# Altium PCB PCB1.PcbDoc
Units mm, origin at the board's own origin, x right, y up, seen from the top; angles counter-clockwise.
Board outline 100 x 100 mm, 4 copper layers (Top Layer 1, Top Layer, Bottom Layer, Bottom Layer 1), stack 1.564 mm thick; 51 components, 49 nets, 288 pads, 24 vias.
Unrouted connection lines stored in the file: 152.
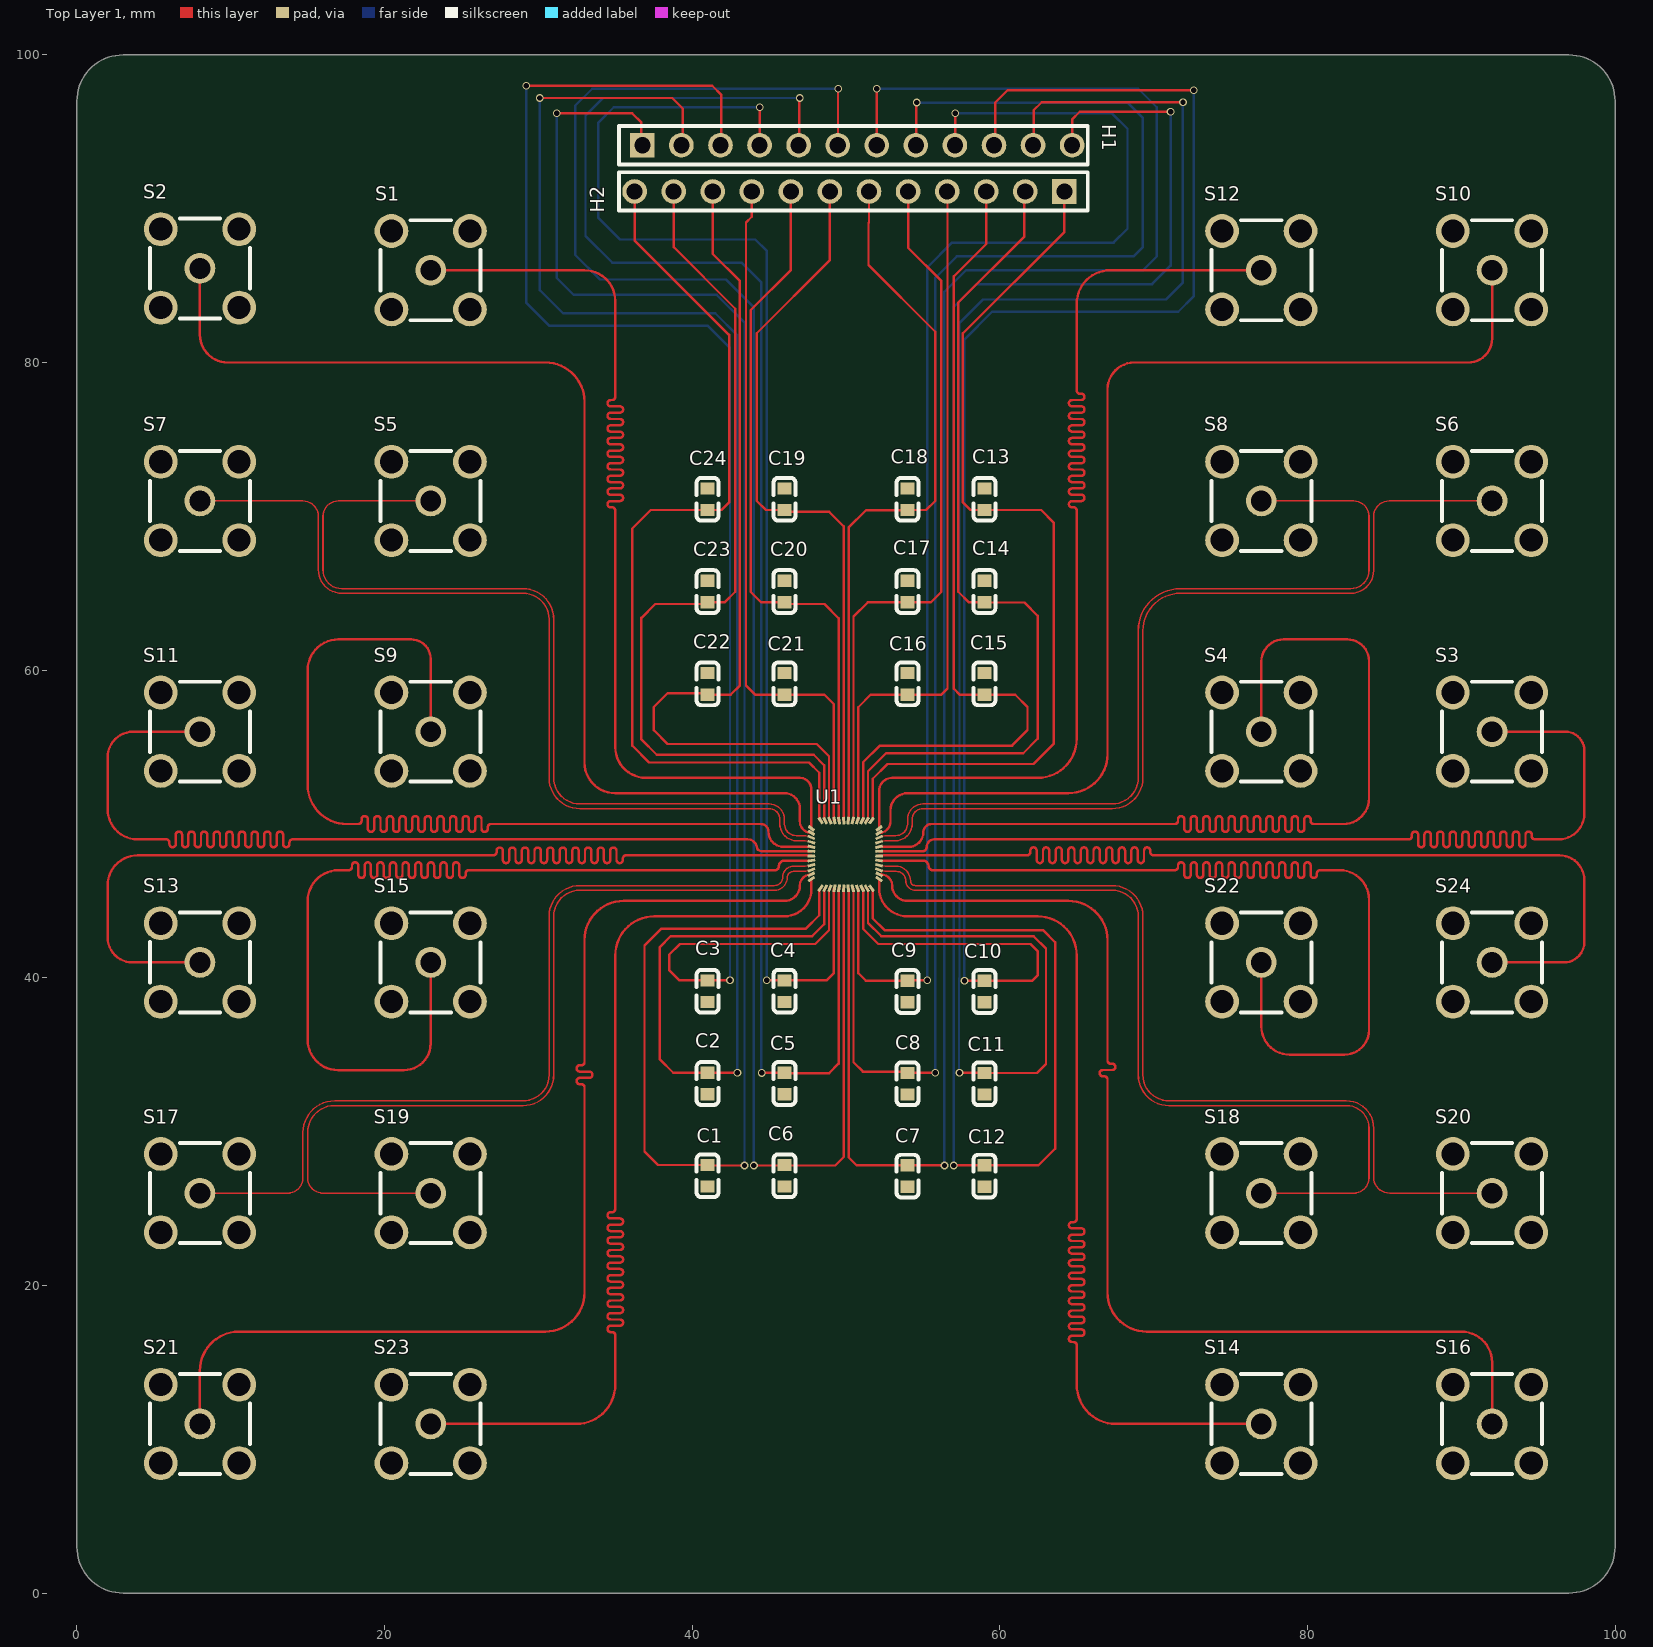
[diagram p0: Top Layer 1 view]
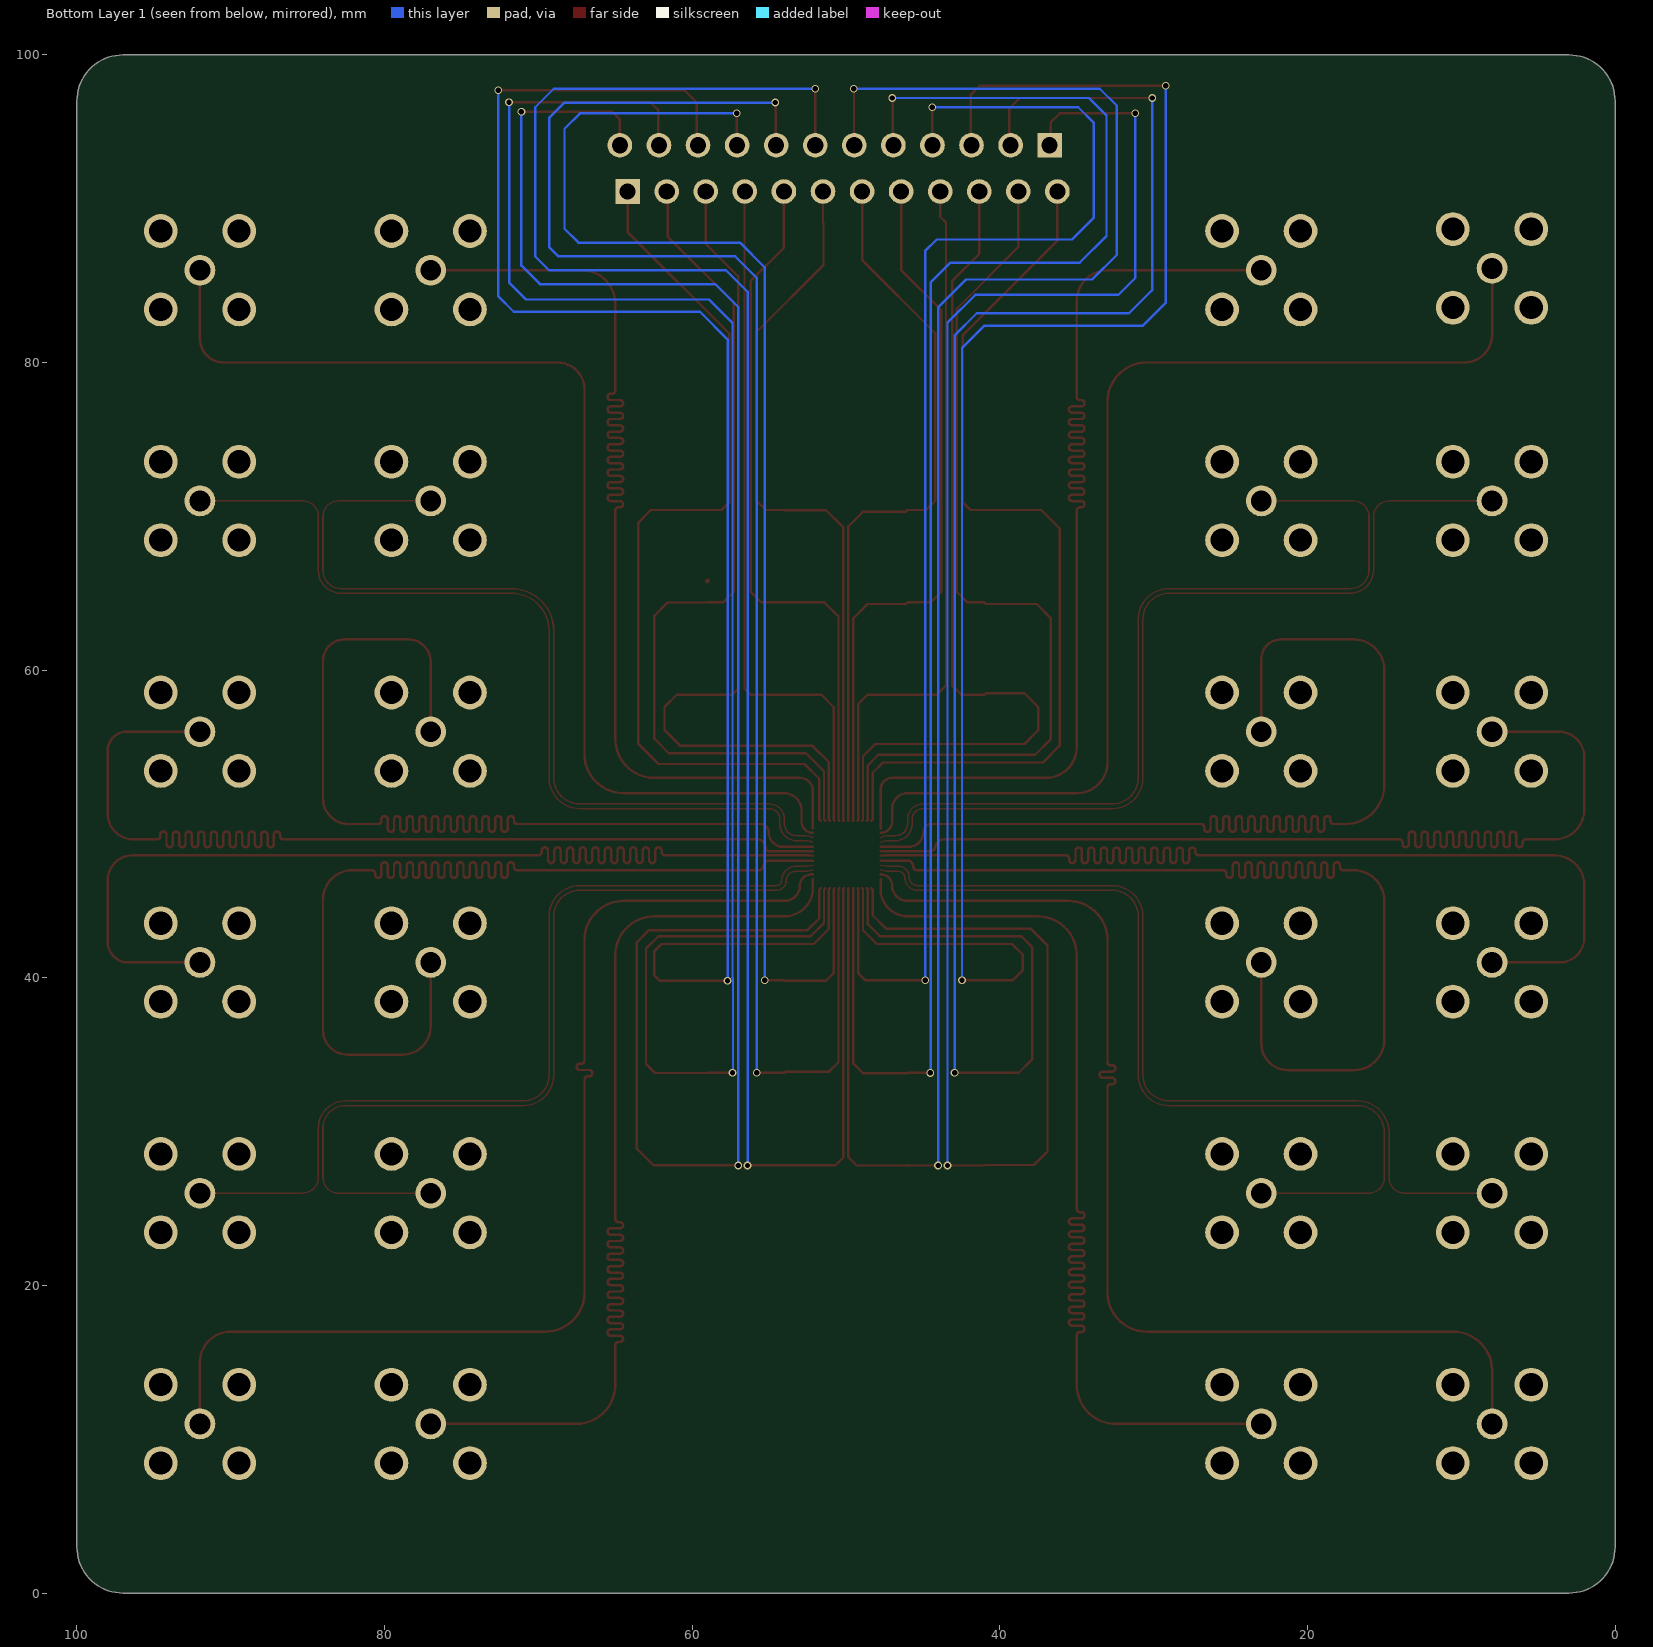
[diagram p1: Bottom Layer 1 view, seen from below]
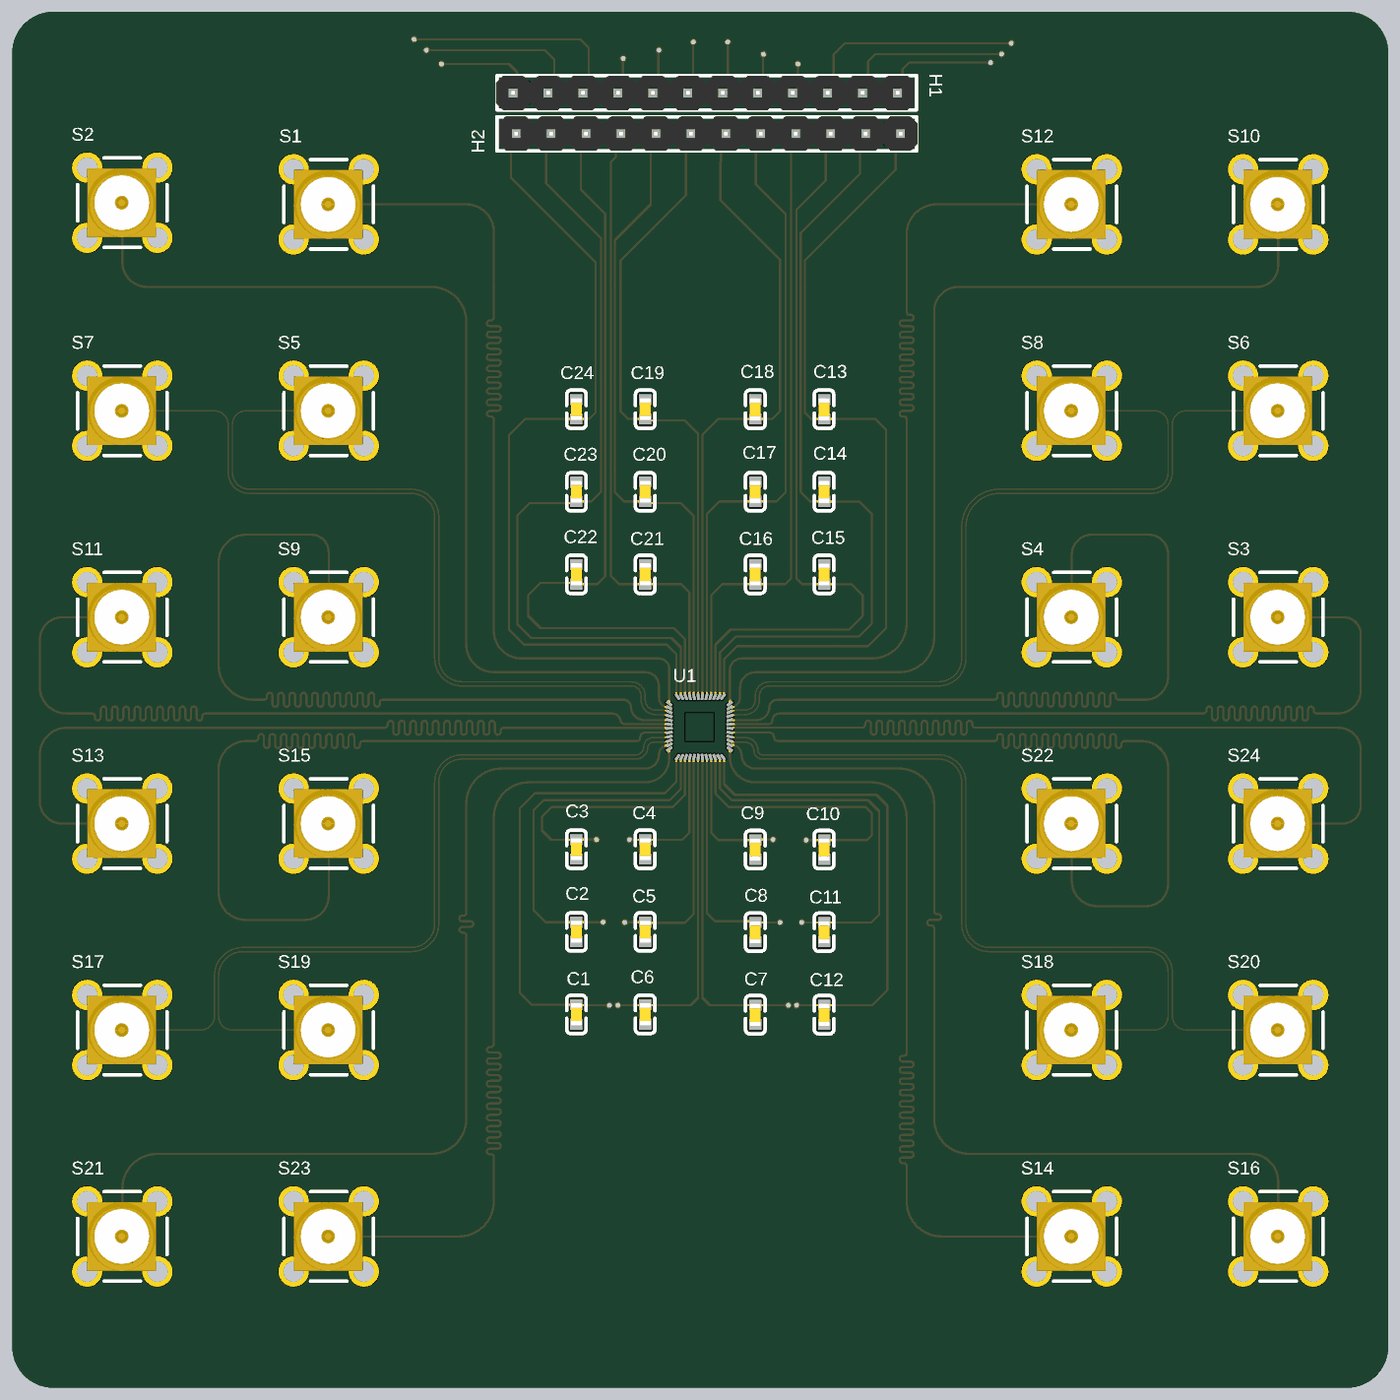
[diagram p2: 3D render of the assembled board from above, using the file's embedded part models]

## Layer stack, top to bottom
Top Solder: solder mask 0.0102, Solder Resist, Dk 3.5
Top Layer 1: signal copper 0.035
Dielectric 2: prepreg 0.0994, PP-006, Dk 4.1
Top Layer: signal copper 0.0152
Dielectric 1: dielectric 1.265, FR-4, Dk 4.8
Bottom Layer: signal copper 0.0152
Dielectric 3: prepreg 0.0994, PP-006, Dk 4.1
Bottom Layer 1: signal copper 0.035
Bottom Solder: solder mask 0.0102, Solder Resist, Dk 3.5

## Board outline
0,3 0,97 cw(c3,97) 3,100 97,100 cw(c97,97) 100,97 100,3 cw(c97,3) 97,0 3,0 cw(c3,3)

## Design rules (kind name [scope] priority, off if disabled: settings)
Clearance [All] p1: gap=0.025 ignorepadtopadclearanceinfootprint=FALSE
DiffPairsRouting [All] p1: maxlimit=0.254 minlimit=0.203 mostfreqgap=0.203 toplayer_minwidth=0.001 toplayer_maxwidth=0.124 toplayer_prefwidth=0.124 midlayer1_minwidth=0.001 midlayer1_maxwidth=0.124 midlayer1_prefwidth=0.124 midlayer2_minwidth=0.001 midlayer2_maxwidth=0.124 midlayer2_prefwidth=0.124 bottomlayer_minwidth=0.001 bottomlayer_maxwidth=0.124 bottomlayer_prefwidth=0.124 maxuncoupledlength=12.7
PlaneConnect [All] p1: planeconnectstyle=Direct reliefexpansion=0.508 reliefentries=4 reliefconductorwidth=0.254 reliefairgap=0.254
PolygonConnect [All] p1: connectstyle=Direct reliefconductorwidth=0.254 reliefentries=4 polygonreliefangle="90 Angle" airgapwidth=0.254
RoutingVias [All] p1: holewidth=0.711 width=1.27 viastyle="Through Hole" minholewidth=0.05 minwidth=0.1 maxholewidth=3 maxwidth=5
SolderMaskExpansion [All] p1: expansion=0.102 istentingtop=FALSE
SupplyNets "Schematic Supply Nets" [InNet('GND')] p1: voltage=0.000
Width [InNet('GND')] p1: maxlimit=0.3 minlimit=0.3 preferedwidth=0.3
28 further rules are at their usual default settings.

## Classes and differential pairs
differential pair RF21: +RF21_P -RF21_N
differential pair RF15: +RF15_P -RF15_N
differential pair RF9: +RF9_P -RF9_N
differential pair RF3: +RF3_P -RF3_N

## Components (designator, comment, footprint, x,y, rotation, side; value= is the part's Value field where it differs from the comment)
C1 "C0603" C0603 41,27.121 r270 top
C2 "C0603" C0603 41,33.121 r270 top
C3 "C0603" C0603 41,39.121 r270 top
C4 "C0603" C0603 46,39.121 r270 top
C5 "C0603" C0603 46,33.121 r270 top
C6 "C0603" C0603 46,27.121 r270 top
C7 "C0603" C0603 54,27.121 r90 top
C8 "C0603" C0603 54,33.121 r90 top
C9 "C0603" C0603 54,39.121 r90 top
C10 "C0603" C0603 59,39.121 r90 top
C11 "C0603" C0603 59,33.121 r90 top
C12 "C0603" C0603 59,27.121 r90 top
C13 "C0603" C0603 59,71.121 r90 top
C14 "C0603" C0603 59,65.121 r90 top
C15 "C0603" C0603 59,59.121 r90 top
C16 "C0603" C0603 54,59.121 r90 top
C17 "C0603" C0603 54,65.121 r90 top
C18 "C0603" C0603 54,71.121 r90 top
C19 "C0603" C0603 46,71.101 r270 top
C20 "C0603" C0603 46,65.101 r270 top
C21 "C0603" C0603 46,59.101 r270 top
C22 "C0603" C0603 41,59.101 r270 top
C23 "C0603" C0603 41,65.101 r270 top
C24 "C0603" C0603 41,71.101 r270 top
H1 "20P" 20P 50.857,94.121 r0 top
H2 "20P" 20P 50.099,91.121 r180 top
S1 "BWSMA" BWSMA 23,86 r0 top
S2 "BWSMA" BWSMA 8,86.121 r0 top
S3 "BWSMA" BWSMA 92,56 r0 top
S4 "BWSMA" BWSMA 77,56 r0 top
S5 "BWSMA" BWSMA 23,71 r0 top
S6 "BWSMA" BWSMA 92,71 r0 top
S7 "BWSMA" BWSMA 8,71 r0 top
S8 "BWSMA" BWSMA 77,71 r0 top
S9 "BWSMA" BWSMA 23,56 r0 top
S10 "BWSMA" BWSMA 92,86 r0 top
S11 "BWSMA" BWSMA 8,56 r0 top
S12 "BWSMA" BWSMA 77,86 r0 top
S13 "BWSMA" BWSMA 8,41 r0 top
S14 "BWSMA" BWSMA 77,11 r0 top
S15 "BWSMA" BWSMA 23,41 r0 top
S16 "BWSMA" BWSMA 92,11 r0 top
S17 "BWSMA" BWSMA 8,26 r0 top
S18 "BWSMA" BWSMA 77,26 r0 top
S19 "BWSMA" BWSMA 23,26 r0 top
S20 "BWSMA" BWSMA 92,26 r0 top
S21 "BWSMA" BWSMA 8,11 r0 top
S22 "BWSMA" BWSMA 77,41 r0 top
S23 "BWSMA" BWSMA 23,11 r0 top
S24 "BWSMA" BWSMA 92,41 r0 top
U1 "2mm" 2mm 49.05,48.721 r0 top

## Footprints (in the part's own frame and the unit in brackets; to place one, negate y for a bottom-side part, rotate by r counter-clockwise, add the part's x,y. Pads: shape width x height; smd on the part's side, far side on the other; paste and mask are expansions set on the pad)
2mm [mm]
  rrect50% 0.5x0.2 smd rot 142.43: 1(-1.3,1)
  rect 0.1x0.05 on Mech16 mask+0.102: 1(0,0) 2(0,-0.1) 3(0,-0.2) 4(0,-0.3) 5(0,-0.55) 6(0,-0.65) 7(0,-0.75) 8(0,-0.85) 9(0,-1.1) 10(0,-1.2) 11(0,-1.3) 12(0,-1.4) 25(1.8,-1.4) 26(1.8,-1.3) 27(1.8,-1.2) 28(1.8,-1.1) 29(1.8,-0.85) 30(1.8,-0.75) 31(1.8,-0.65) 32(1.8,-0.55) 33(1.8,-0.3) 34(1.8,-0.2) 35(1.8,-0.1) 36(1.8,0)
  rrect50% 0.5x0.2 smd rot 148.27: 2(-1.3,0.7)
  rrect50% 0.5x0.2 smd rot 155.09: 3(-1.3,0.4)
  rrect50% 0.5x0.2 smd rot 162.81: 4(-1.3,0.1)
  rrect50% 0.5x0.2 smd rot 164.93: 5(-1.3,-0.2)
  rrect50% 0.5x0.2 smd rot 173.42: 6(-1.3,-0.5)
  rrect50% 0.5x0.2 smd rot 2.12: 7(-1.3,-0.8)
  rrect50% 0.5x0.2 smd rot 10.71: 8(-1.3,-1.1)
  rrect50% 0.5x0.2 smd rot 12.99: 9(-1.3,-1.4)
  rrect50% 0.5x0.2 smd rot 21.02: 10(-1.3,-1.7)
  rrect50% 0.5x0.2 smd rot 28.16: 11(-1.3,-2)
  rrect50% 0.5x0.2 smd rot 34.76: 12(-1.3,-2.3)
  rrect50% 0.5x0.2 smd rot 55.3: 13(-0.7,-2.9)
  rect 0.05x0.1 on Mech16 mask+0.102: 13(0.2,-1.6) 14(0.3,-1.6) 15(0.4,-1.6) 16(0.5,-1.6) 17(0.75,-1.6) 18(0.85,-1.6) 19(0.95,-1.6) 20(1.05,-1.6) 21(1.3,-1.6) 22(1.4,-1.6) 23(1.5,-1.6) 24(1.6,-1.6) 37(1.6,0.2) 38(1.5,0.2) 39(1.4,0.2) 40(1.3,0.2) 41(1.05,0.2) 42(0.95,0.2) 43(0.85,0.2) 44(0.75,0.2) 45(0.5,0.2) 46(0.4,0.2) 47(0.3,0.2) 48(0.2,0.2)
  rrect50% 0.5x0.2 smd rot 61.8: 14(-0.4,-2.9)
  rrect50% 0.5x0.2 smd rot 68.98: 15(-0.1,-2.9)
  rrect50% 0.5x0.2 smd rot 76.84: 16(0.2,-2.9)
  rrect50% 0.5x0.2 smd rot 79.11: 17(0.5,-2.9)
  rrect50% 0.5x0.2 smd rot 87.95: 18(0.8,-2.9)
  rrect50% 0.5x0.2 smd rot 96.78: 19(1.1,-2.9)
  rrect50% 0.5x0.2 smd rot 105.2: 20(1.4,-2.9)
  rrect50% 0.5x0.2 smd rot 107.1: 21(1.7,-2.9)
  rrect50% 0.5x0.2 smd rot 115.07: 22(2,-2.9)
  rrect50% 0.5x0.2 smd rot 121.65: 23(2.3,-2.9)
  rrect50% 0.5x0.2 smd rot 127.62: 24(2.6,-2.9)
  rrect50% 0.5x0.2 smd rot 145.3: 25(3.1,-2.3)
  rrect50% 0.5x0.2 smd rot 151.55: 26(3.1,-2)
  rrect50% 0.5x0.2 smd rot 159.02: 27(3.1,-1.7)
  rrect50% 0.5x0.2 smd rot 167.01: 28(3.1,-1.4)
  rrect50% 0.5x0.2 smd rot 169.38: 29(3.1,-1.1)
  rrect50% 0.5x0.2 smd rot 177.71: 30(3.1,-0.8)
  rrect50% 0.5x0.2 smd rot 6.73: 31(3.1,-0.5)
  rrect50% 0.5x0.2 smd rot 15.15: 32(3.1,-0.2)
  rrect50% 0.5x0.2 smd rot 17.38: 33(3.1,0.1)
  rrect50% 0.5x0.2 smd rot 24.72: 34(3.1,0.4)
  rrect50% 0.5x0.2 smd rot 31.7: 35(3.1,0.7)
  rrect50% 0.5x0.2 smd rot 37.79: 36(3.1,1)
  rrect50% 0.5x0.2 smd rot 52.43: 37(2.6,1.5)
  rrect50% 0.5x0.2 smd rot 58.24: 38(2.3,1.5)
  rrect50% 0.5x0.2 smd rot 65.21: 39(2,1.5)
  rrect50% 0.5x0.2 smd rot 72.94: 40(1.7,1.5)
  rrect50% 0.5x0.2 smd rot 74.99: 41(1.4,1.5)
  rrect50% 0.5x0.2 smd rot 83.25: 42(1.1,1.5)
  rrect50% 0.5x0.2 smd rot 92.15: 43(0.8,1.5)
  rrect50% 0.5x0.2 smd rot 100.84: 44(0.5,1.5)
  rrect50% 0.5x0.2 smd rot 102.99: 45(0.2,1.5)
  rrect50% 0.5x0.2 smd rot 111.03: 46(-0.1,1.5)
  rrect50% 0.5x0.2 smd rot 118.1: 47(-0.4,1.5)
  rrect50% 0.5x0.2 smd rot 124.48: 48(-0.7,1.5)
  body extent -0.1,-1.7 1.9,0.3, height 0.2
20P [mm]
  rect 1.6x1.6 hole 1.05: 1(-14.097,0)
  round 1.6 hole 1.05: 2(-11.557,0) 3(-9.017,0) 4(-6.477,0) 5(-3.937,0) 6(-1.397,0) 7(1.143,0) 8(3.683,0) 9(6.223,0) 10(8.763,0) 11(11.303,0) 12(13.843,0)
  silkscreen extent -15.62,-1.25 14.86,1.25, body extent -15.71,-1.27 14.73,1.23, height 8.61
BWSMA [mm]
  round 2.2 hole 1.5 paste-2539.97 mask+0.051: 1(-2.55,-2.55) 2(-2.55,2.55) 3(2.55,2.55)
  round 2.2 hole 1.5 copper offset 0,0 paste-2539.97 mask+0.051: 4(2.55,-2.55)
  round 2 hole 1.35 paste-2539.97 mask+0.051: 5(0,0)
  silkscreen extent -3.25,-3.25 3.25,3.25, body extent -2.54,-2.5 2.46,2.5, height 8
C0603 [mm]
  rect 0.8x0.9 smd: 1(-0.71,0) 2(0.69,0)
  silkscreen extent -1.4,-0.71 1.38,0.71, body extent -0.82,-0.4 0.78,0.4, height 0.5

## Via types
v1: diameter 0.5, hole 0.35, Top Layer 1 to Bottom Layer 1, tented both sides, 24 vias

## Nets (pads, with @x,y where several pads share a name; then routed paths per layer and width w, separated by ;. In a path a pad name is that pad's centre, name@x,y a point inside that pad or via, vN(x,y) a via of type N, cw(c..) or ccw(c..) an arc to the next point about the centre after c; other vN are vias at no path point)
GND: C1.2 C2.2 C3.2 C4.2 C5.2 C6.2 C7.1 C8.1 C9.1 C10.1 C11.1 C12.1 C13.2 C14.2 C15.2 C16.2 C17.2 C18.2 C19.1 C20.1 C21.1 C22.1 C23.1 C24.1 S1.1 S1.2 S1.3 S1.4 S2.1 S2.2 S2.3 S2.4 S3.1 S3.2 S3.3 S3.4 S4.1 S4.2 S4.3 S4.4 S5.1 S5.2 S5.3 S5.4 S6.1 S6.2 S6.3 S6.4 S7.1 S7.2 S7.3 S7.4 S8.1 S8.2 S8.3 S8.4 S9.1 S9.2 S9.3 S9.4 S10.1 S10.2 S10.3 S10.4 S11.1 S11.2 S11.3 S11.4 S12.1 S12.2 S12.3 S12.4 S13.1 S13.2 S13.3 S13.4 S14.1 S14.2 S14.3 S14.4 S15.1 S15.2 S15.3 S15.4 S16.1 S16.2 S16.3 S16.4 S17.1 S17.2 S17.3 S17.4 S18.1 S18.2 S18.3 S18.4 S19.1 S19.2 S19.3 S19.4 S20.1 S20.2 S20.3 S20.4 S21.1 S21.2 S21.3 S21.4 S22.1 S22.2 S22.3 S22.4 S23.1 S23.2 S23.3 S23.4 S24.1 S24.2 S24.3 S24.4 | length 0
  Top Layer 1 w0.3: C14.2 C14.2@59.011,65.8
NetC1_1: C1.1 H1.1 U1.13@48.35,45.821 | length 120.4
  Top Layer 1 w0.156: v1(31.2,96.2) 36.1,96.2 36.7,95.6 36.7,94.181 H1.1 ; v1(43.4,27.8) 41.031,27.8 C1.1 37.769,27.831 36.9,28.7 36.9,42.1 38,43.2 47.4,43.2 48.265,44.065 48.265,45.736 U1.13@48.35,45.821
  Bottom Layer 1 w0.156: v1(31.2,96.2) 31.2,85.5 32.3,84.4 41.6,84.4 43.4,82.6 v1(43.4,27.8)
NetC2_1: C2.1 H1.2 U1.14@48.65,45.821 | length 112.9
  Top Layer 1 w0.156: v1(30.1,97.2) 38.7,97.2 39.4,96.5 39.4,94.221 H1.2 ; v1(42.942,33.836) 42.937,33.831 C2.1 38.769,33.831 37.9,34.7 37.9,42 38.6,42.7 47.8,42.7 48.579,43.479 48.579,45.75 U1.14@48.65,45.821
  Bottom Layer 1 w0.156: v1(30.1,97.2) 30.1,84.7 31.6,83.2 41.5,83.2 42.942,81.758 v1(42.942,33.836)
NetC3_1: C3.1 H1.3 U1.15@48.95,45.821 | length 105
  Top Layer 1 w0.156: v1(29.208,97.998) 41.302,97.998 41.9,97.4 41.9,94.181 H1.3 ; C3.1 39.169,39.831 38.5,40.5 38.5,41.5 39.2,42.2 48,42.2 48.896,43.096 48.896,45.767 U1.15@48.95,45.821 ; C3.1@41.01,39.841 v1(42.456,39.841)
  Bottom Layer 1 w0.156: v1(29.208,97.998) 29.2,97.99 29.2,83.9 30.7,82.4 41,82.4 42.456,80.944 v1(42.456,39.841)
NetC4_1: C4.1 H1.4 U1.16@49.25,45.821 | length 88.9
  Top Layer 1 w0.156: H1.4 44.39,94.131 44.39,96.59 v1(44.4,96.6) ; v1(44.854,39.832) 44.855,39.831 C4.1 48.731,39.831 49.216,40.316 49.216,45.787 U1.16@49.25,45.821
  Bottom Layer 1 w0.156: v1(44.4,96.6) 34.9,96.6 33.9,95.6 33.9,89.4 35.3,88 44.1,88 44.854,87.246 v1(44.854,39.832)
NetC5_1: C5.1 H1.5 U1.17@49.55,45.821 | length 106.1
  Top Layer 1 w0.156: v1(44.514,33.818) 44.527,33.831 C5.1 46.031,33.8 48.9,33.8 49.522,34.422 49.522,45.793 U1.17@49.55,45.821 ; H1.5 46.96,94.161 46.96,97.16 v1(47,97.2)
  Bottom Layer 1 w0.156: v1(44.514,33.818) 44.5,33.832 44.5,85.2 43.2,86.5 34.8,86.5 33.065,88.235 33.065,96.065 34.2,97.2 v1(47,97.2)
NetC6_1: C6.1 H1.6 U1.18@49.85,45.821 | length 123.3
  Top Layer 1 w0.156: v1(44.015,27.8) 45.969,27.8 C6.1 46.031,27.8 49.3,27.8 49.85,28.35 U1.18@49.85,45.821 ; H1.6 49.48,94.141 49.48,97.78 v1(49.5,97.8)
  Bottom Layer 1 w0.156: v1(44.015,27.8) 44.015,83.585 42.2,85.4 34,85.4 32.4,87 32.4,96.7 33.5,97.8 v1(49.5,97.8)
NetC7_2: C7.2 H1.7 U1.19@50.15,45.821 | length 127.6
  Top Layer 1 w0.156: U1.19@50.15,45.821 50.168,45.803 50.168,28.332 50.689,27.811 C7.2 56.389,27.811 v1(56.4,27.8) ; H1.7 v1(52,97.8)
  Bottom Layer 1 w0.156: v1(52,97.8) 69,97.8 70.2,96.6 70.2,86.9 69.3,86 57.8,86 56.4,84.6 v1(56.4,27.8)
NetC8_2: C8.2 H1.8 U1.20@50.45,45.821 | length 109.4
  Top Layer 1 w0.156: U1.20@50.45,45.821 50.489,45.782 50.489,34.511 51.1,33.9 53.911,33.9 C8.2 54.011,33.822 v1(55.809,33.822) ; H1.8 54.566,94.147 54.566,96.88 v1(54.593,96.906)
  Bottom Layer 1 w0.156: v1@54.492,96.906 v1(54.593,96.906) 54.694,96.906 54.7,96.9 68.3,96.9 69.3,95.9 69.3,87.5 68.7,86.9 57.2,86.9 55.809,85.509 v1(55.809,33.822)
NetC9_2: C9.2 H1.9 U1.21@50.75,45.821 | length 90.8
  Top Layer 1 w0.156: U1.21@50.75,45.821 50.794,45.777 50.794,40.306 51.289,39.811 C9.2 54.029,39.839 v1(55.291,39.839) ; H1.9 57.09,94.131 57.09,96.19 v1(57.1,96.2)
  Bottom Layer 1 w0.156: v1(55.291,39.839) 55.291,86.191 56.9,87.8 67.4,87.8 68.3,88.7 68.3,95.2 67.3,96.2 v1(57.1,96.2)
NetC10_2: C10.2 H1.10 U1.22@51.05,45.821 | length 108.3
  Top Layer 1 w0.156: U1.22@51.05,45.821 51.114,45.757 51.114,43.186 52.1,42.2 62,42.2 62.46,41.74 62.46,40.16 62.1,39.8 59.011,39.8 C10.2 58.989,39.8 v1(57.7,39.8) ; H1.10 59.7,94.201 59.7,96.9 60.5,97.7 v1(72.6,97.7)
  Bottom Layer 1 w0.156: v1(57.7,39.8) 57.7,81.5 59.5,83.3 71.6,83.3 72.6,84.3 v1(72.6,97.7)
NetC11_2: C11.2 H1.11 U1.23@51.35,45.821 | length 116.3
  Top Layer 1 w0.156: U1.23@51.35,45.821 51.429,45.742 51.429,43.571 52.3,42.7 62.2,42.7 63,41.9 63,34.4 62.411,33.811 C11.2 58.989,33.822 v1(57.376,33.822) ; H1.11 62.2,94.161 62.2,96.4 62.726,96.926 v1(71.905,96.926)
  Bottom Layer 1 w0.156: v1(57.376,33.822) 57.346,33.851 57.346,39.946 57.376,39.976 57.376,82.576 58.9,84.1 70.8,84.1 71.905,85.205 v1(71.905,96.926)
NetC12_2: C12.2 H1.12 U1.24@51.65,45.821 | length 124.3
  Top Layer 1 w0.156: U1.24@51.65,45.821 51.742,45.729 51.742,43.858 52.5,43.1 62.8,43.1 63.6,42.3 63.6,28.9 62.511,27.811 C12.2 57.011,27.811 v1(57,27.8) ; H1.12 64.7,95.8 65.2,96.3 v1(71.1,96.3)
  Bottom Layer 1 w0.156: v1(57,27.8) 57,83.6 58.5,85.1 69.9,85.1 71.1,86.3 v1(71.1,96.3)
NetC13_1: C13.1 H2.1 U1.37@51.65,50.221 | length 59.2
  Top Layer 1 w0.156: U1.37@51.65,50.221 51.741,50.312 51.741,52.941 52.7,53.9 62.2,53.9 63.5,55.2 63.5,69.6 62.689,70.411 C13.1 58.089,70.411 57.6,70.9 57.6,81.9 64.196,88.496 H2.1
NetC14_1: C14.1 H2.2 U1.38@51.35,50.221 | length 56.8
  Top Layer 1 w0.156: U1.38@51.35,50.221 51.429,50.3 51.429,53.429 52.6,54.6 61.52,54.6 62.46,55.54 62.46,63.54 61.6,64.4 59.011,64.4 C14.1 57.989,64.411 57.3,65.1 57.3,83.9 61.6,88.2 61.6,91.065 H2.2
NetC15_1: C15.1 H2.3 U1.39@51.05,50.221 | length 55.4
  Top Layer 1 w0.156: U1.39@51.05,50.221 51.113,50.284 51.113,54.013 52.2,55.1 60.8,55.1 61.8,56.1 61.8,57.6 61,58.4 59.011,58.4 C15.1 57.389,58.411 57,58.8 57,85.6 59.116,87.716 H2.3
NetC16_1: C16.1 H2.4 U1.40@50.75,50.221 | length 46
  Top Layer 1 w0.156: U1.40@50.75,50.221 50.794,50.265 50.794,57.594 51.611,58.411 C16.1 56.211,58.411 56.6,58.8 56.6,91.097 H2.4
NetC17_1: C17.1 H2.5 U1.41@50.45,50.221 | length 46.6
  Top Layer 1 w0.156: U1.41@50.45,50.221 50.489,50.26 50.489,63.489 51.411,64.411 C17.1 55.511,64.411 56.2,65.1 56.2,85.3 54.036,87.464 H2.5
NetC18_1: C18.1 H2.6 U1.42@50.15,50.221 | length 47.3
  Top Layer 1 w0.156: U1.42@50.15,50.221 50.168,50.239 50.168,69.268 51.3,70.4 53.989,70.4 C18.1 55.211,70.411 55.8,71 55.8,82 51.465,86.335 51.465,89.079 51.496,89.11 H2.6
NetC19_2: C19.2 H2.7 U1.43@49.85,50.221 | length 47.6
  Top Layer 1 w0.156: H2.7 48.956,86.656 44.2,81.9 44.2,71 44.789,70.411 C19.2 46.111,70.3 48.9,70.3 49.85,69.35 U1.43@49.85,50.221
NetC20_2: C20.2 H2.8 U1.44@49.55,50.221 | length 46.7
  Top Layer 1 w0.156: H2.8 46.416,86.016 43.8,83.4 43.8,65.1 44.489,64.411 C20.2 46.111,64.3 48.6,64.3 49.522,63.378 49.522,50.249 U1.44@49.55,50.221
NetC21_2: C21.2 H2.9 U1.45@49.25,50.221 | length 46.1
  Top Layer 1 w0.156: H2.9 43.876,89.476 43.5,89.1 43.5,59 44.089,58.411 C21.2 48.589,58.411 49.216,57.784 49.216,50.255 U1.45@49.25,50.221
NetC22_2: C22.2 H2.10 U1.46@48.95,50.221 | length 56.9
  Top Layer 1 w0.156: H2.10 41.336,87.064 43.1,85.3 43.1,59 42.511,58.411 C22.2 40.911,58.5 38.4,58.5 37.5,57.6 37.5,56.1 38.4,55.2 48.1,55.2 48.896,54.404 48.896,50.275 U1.46@48.95,50.221
NetC23_2: C23.2 H2.11 U1.47@48.65,50.221 | length 58.6
  Top Layer 1 w0.156: H2.11 38.8,91.117 38.8,87.5 42.8,83.5 42.8,65.1 42.111,64.411 C23.2 40.889,64.3 37.6,64.3 36.7,63.4 36.7,55.5 37.7,54.5 47.9,54.5 48.579,53.821 48.579,50.292 U1.47@48.65,50.221
NetC24_2: C24.2 H2.12 U1.48@48.35,50.221 | length 59.9
  Top Layer 1 w0.156: H2.12 36.256,87.944 42.4,81.8 42.4,70.9 41.911,70.411 C24.2 37.311,70.411 36.1,69.2 36.1,55.1 37.2,54 47.6,54 48.265,53.335 48.265,50.306 U1.48@48.35,50.221
RF1: S1.5 U1.1@47.75,49.721 | length 73.1
  Top Layer 1 w0.156: S1.5 33,86 cw(c33,84) 35,84 35,80.1 35,78.2 35,77.767 cw(c34.795,77.767) 34.795,77.562 34.697,77.562 ccw(c34.697,77.357) 34.697,77.152 35.303,77.152 cw(c35.303,76.946) 35.303,76.741 34.697,76.741 ccw(c34.697,76.536) 34.697,76.331 35.303,76.331 cw(c35.303,76.125) 35.303,75.92 34.697,75.92 ccw(c34.697,75.715) 34.697,75.51 35.303,75.51 cw(c35.303,75.304) 35.303,75.099 34.697,75.099 ccw(c34.697,74.894) 34.697,74.689 35.303,74.689 cw(c35.303,74.483) 35.303,74.278 34.697,74.278 ccw(c34.697,74.073) 34.697,73.868 35.303,73.868 cw(c35.303,73.662) 35.303,73.457 34.697,73.457 ccw(c34.697,73.252) 34.697,73.047 35.303,73.047 cw(c35.303,72.841) 35.303,72.636 34.697,72.636 ccw(c34.697,72.431) 34.697,72.226 35.303,72.226 cw(c35.303,72.02) 35.303,71.815 34.697,71.815 ccw(c34.697,71.61) 34.697,71.405 35.303,71.405 cw(c35.303,71.199) 35.303,70.994 34.697,70.994 ccw(c34.697,70.789) 34.697,70.584 34.795,70.584 cw(c34.795,70.378) 35,70.378 35,70.3 35,55 ccw(c37,55) 37,53 47,53 cw(c47,52.25) 47.75,52.25 U1.1@47.75,49.721
RF2: S2.5 U1.2@47.75,49.421 | length 73
  Top Layer 1 w0.156: S2.5 8,81.809 ccw(c9.809,81.809) 9.809,80 30.46,80 cw(c30.46,77.46) 33,77.46 33,54 ccw(c35,54) 35,52 46,52 cw(c46,51) 47,51 47,50.171 ccw(c47.75,50.171) U1.2@47.75,49.421
RF3_N: S7.5 U1.4@47.75,48.821 | length 58.4
  Top Layer 1 w0.1: S7.5 14.697,71 cw(c14.697,70) 15.697,70 15.697,66.52 ccw(c17.216,66.52) 17.216,65 29,65 cw(c29,63.303) 30.697,63.303 30.697,53 ccw(c32.697,53) 32.697,51 45,51 cw(c45,50.303) 45.697,50.303 45.697,50 ccw(c46.787,50) 46.787,48.91 47.163,48.91 cw(c47.163,46.925) U1.4@47.75,48.821
RF3_P: S5.5 U1.3@47.75,49.121 | length 57.2
  Top Layer 1 w0.1: S5.5 17,71 ccw(c17,70) 16,70 16,66.52 ccw(c17.216,66.52) 17.216,65.303 29,65.303 cw(c29,63.303) 31,63.303 31,53 ccw(c32.697,53) 32.697,51.303 45,51.303 cw(c45,50.303) 46,50.303 46,50 ccw(c46.753,50) 46.753,49.247 47.178,49.247 cw(c47.178,47.889) U1.3@47.75,49.121
RF5: S9.5 U1.5@47.75,48.521 | length 73.7
  Top Layer 1 w0.156: 19.327,50.303 19.327,49.697 cw(c19.122,49.697) 18.917,49.697 18.917,50.303 ccw(c18.712,50.303) 18.506,50.303 18.506,50.205 cw(c18.301,50.205) 18.301,50 18,50 17.54,50 cw(c17.54,52.54) 15,52.54 15,60 cw(c17,60) 17,62 21.729,62 cw(c21.729,60.729) 23,60.729 S9.5 ; 19.327,50.303 cw(c19.533,50.303) 19.738,50.303 19.738,49.697 ccw(c19.943,49.697) 20.148,49.697 20.148,50.303 cw(c20.354,50.303) 20.559,50.303 20.559,49.697 ccw(c20.764,49.697) 20.969,49.697 20.969,50.303 cw(c21.175,50.303) 21.38,50.303 21.38,49.697 ccw(c21.585,49.697) 21.79,49.697 21.79,50.303 cw(c21.996,50.303) 22.201,50.303 22.201,49.697 ccw(c22.406,49.697) 22.611,49.697 22.611,50.303 cw(c22.817,50.303) 23.022,50.303 23.022,49.697 ccw(c23.227,49.697) 23.432,49.697 23.432,50.303 cw(c23.638,50.303) 23.843,50.303 23.843,49.697 ccw(c24.048,49.697) 24.253,49.697 24.253,50.303 cw(c24.459,50.303) 24.664,50.303 24.664,49.697 ccw(c24.869,49.697) 25.074,49.697 25.074,50.303 cw(c25.28,50.303) 25.485,50.303 25.485,49.697 ccw(c25.69,49.697) 25.895,49.697 25.895,50.303 cw(c26.101,50.303) 26.306,50.303 26.306,49.697 ccw(c26.511,49.697) 26.716,49.697 26.716,49.795 cw(c26.922,49.795) 26.922,50 27,50 44.447,50 cw(c44.447,49.485) 44.962,49.485 ccw(c45.926,49.485) 45.926,48.521 U1.5@47.75,48.521
RF6: S11.5 U1.6@47.75,48.221 | length 73.4
  Top Layer 1 w0.156: S11.5 3.658,56 ccw(c3.658,54.342) 2,54.342 2,50.946 ccw(c3.946,50.946) 3.946,49 5.2,49 5.812,49 cw(c5.812,48.795) 6.017,48.795 6.017,48.697 ccw(c6.222,48.697) 6.427,48.697 6.427,49.303 cw(c6.633,49.303) 6.838,49.303 6.838,48.697 ccw(c7.043,48.697) 7.248,48.697 7.248,49.303 cw(c7.454,49.303) 7.659,49.303 7.659,48.697 ccw(c7.864,48.697) 8.069,48.697 8.069,49.303 cw(c8.275,49.303) 8.48,49.303 8.48,48.697 ccw(c8.685,48.697) 8.89,48.697 8.89,49.303 cw(c9.096,49.303) 9.301,49.303 9.301,48.697 ccw(c9.506,48.697) 9.711,48.697 9.711,49.303 cw(c9.917,49.303) 10.122,49.303 10.122,48.697 ccw(c10.327,48.697) 10.532,48.697 10.532,49.303 cw(c10.738,49.303) 10.943,49.303 10.943,48.697 ccw(c11.148,48.697) 11.353,48.697 11.353,49.303 cw(c11.559,49.303) 11.764,49.303 11.764,48.697 ccw(c11.969,48.697) 12.174,48.697 12.174,49.303 cw(c12.38,49.303) 12.585,49.303 12.585,48.697 ccw(c12.79,48.697) 12.995,48.697 12.995,49.303 cw(c13.201,49.303) 13.406,49.303 13.406,48.697 ccw(c13.611,48.697) 13.816,48.697 13.816,48.795 cw(c14.022,48.795) 14.022,49 14.1,49 43.597,49 cw(c43.597,48.369) 44.225,48.428 ccw(c44.381,48.444) 44.288,48.318 ccw(c44.586,48.728) 44.585,48.221 47.577,48.221 U1.6@47.75,48.221
RF7: S3.5 U1.31@52.15,48.221 | length 73.8
  Top Layer 1 w0.156: U1.31@52.15,48.221 54.965,48.221 ccw(c54.965,48.498) 55.242,48.498 cw(c55.744,48.498) 55.744,49 86.5,49 86.578,49 ccw(c86.578,49.205) 86.784,49.205 86.784,49.303 cw(c86.989,49.303) 87.194,49.303 87.194,48.697 ccw(c87.399,48.697) 87.605,48.697 87.605,49.303 cw(c87.81,49.303) 88.015,49.303 88.015,48.697 ccw(c88.22,48.697) 88.426,48.697 88.426,49.303 cw(c88.631,49.303) 88.836,49.303 88.836,48.697 ccw(c89.041,48.697) 89.247,48.697 89.247,49.303 cw(c89.452,49.303) 89.657,49.303 89.657,48.697 ccw(c89.862,48.697) 90.068,48.697 90.068,49.303 cw(c90.273,49.303) 90.478,49.303 90.478,48.697 ccw(c90.683,48.697) 90.889,48.697 90.889,49.303 cw(c91.094,49.303) 91.299,49.303 91.299,48.697 ccw(c91.504,48.697) 91.71,48.697 91.71,49.303 cw(c91.915,49.303) 92.12,49.303 92.12,48.697 ccw(c92.325,48.697) 92.531,48.697 92.531,49.303 cw(c92.736,49.303) 92.941,49.303 92.941,48.697 ccw(c93.146,48.697) 93.352,48.697 93.352,49.303 cw(c93.557,49.303) 93.762,49.303 93.762,48.697 ccw(c93.967,48.697) 94.173,48.697 94.173,49.303 cw(c94.378,49.303) 94.583,49.303 94.583,49.205 ccw(c94.788,49.205) 94.788,49 95.3,49 96.325,49 ccw(c96.325,50.675) 98,50.675 98,54.76 ccw(c96.76,54.76) 96.76,56 S3.5
RF8: S4.5 U1.32@52.15,48.521 | length 73.2
  Top Layer 1 w0.156: U1.32@52.15,48.521 54.096,48.521 ccw(c54.096,49.446) 55.021,49.446 cw(c55.576,49.446) 55.576,50 71.3,50 71.378,50 ccw(c71.378,50.205) 71.584,50.205 71.584,50.303 cw(c71.789,50.303) 71.994,50.303 71.994,49.697 ccw(c72.199,49.697) 72.405,49.697 72.405,50.303 cw(c72.61,50.303) 72.815,50.303 72.815,49.697 ccw(c73.02,49.697) 73.226,49.697 73.226,50.303 cw(c73.431,50.303) 73.636,50.303 73.636,49.697 ccw(c73.841,49.697) 74.047,49.697 74.047,50.303 cw(c74.252,50.303) 74.457,50.303 74.457,49.697 ccw(c74.662,49.697) 74.868,49.697 74.868,50.303 cw(c75.073,50.303) 75.278,50.303 75.278,49.697 ccw(c75.483,49.697) 75.689,49.697 75.689,50.303 cw(c75.894,50.303) 76.099,50.303 76.099,49.697 ccw(c76.304,49.697) 76.51,49.697 76.51,50.303 cw(c76.715,50.303) 76.92,50.303 76.92,49.697 ccw(c77.125,49.697) 77.331,49.697 77.331,50.303 cw(c77.536,50.303) 77.741,50.303 77.741,49.697 ccw(c77.946,49.697) 78.152,49.697 78.152,50.303 cw(c78.357,50.303) 78.562,50.303 78.562,49.697 ccw(c78.767,49.697) 78.973,49.697 78.973,50.303 cw(c79.178,50.303) 79.383,50.303 79.383,49.697 ccw(c79.588,49.697) 79.794,49.697 79.794,50.303 cw(c79.999,50.303) 80.204,50.303 80.204,50.205 ccw(c80.409,50.205) 80.409,50 80.9,50 82.335,50 ccw(c82.335,51.665) 84,51.665 84,60.588 ccw(c82.588,60.588) 82.588,62 78.449,62 ccw(c78.449,60.551) 77,60.551 S4.5
RF9_N: S8.5 U1.34@52.15,49.121 | length 57
  Top Layer 1 w0.1: U1.34@52.15,49.121 cw(c52.723,47.877) 52.723,49.246 53.246,49.246 ccw(c53.246,50) 54,50 54,50.303 cw(c55,50.303) 55,51.303 67.303,51.303 ccw(c67.303,53) 69,53 69,62.559 cw(c71.745,62.559) 71.745,65.303 82.808,65.303 ccw(c82.808,66.495) 84,66.495 84,70 ccw(c83,70) 83,71 S8.5
RF9_P: S6.5 U1.33@52.15,48.821 | length 58.2
  Top Layer 1 w0.1: U1.33@52.15,48.821 cw(c52.736,46.947) 52.736,48.911 53.214,48.911 ccw(c53.214,50) 54.303,50 54.303,50.303 cw(c55,50.303) 55,51 67.303,51 ccw(c67.303,53) 69.303,53 69.303,62.559 cw(c71.745,62.559) 71.745,65 82.808,65 ccw(c82.808,66.495) 84.303,66.495 84.303,70 cw(c85.303,70) 85.303,71 S6.5
RF11: S10.5 U1.35@52.15,49.421 | length 73.1
  Top Layer 1 w0.156: U1.35@52.15,49.421 52.193,49.422 ccw(c52.15,50.161) 52.891,50.161 52.891,50.891 cw(c54,50.891) 54,52 64.46,52 ccw(c64.46,54.54) 67,54.54 67,78.251 cw(c68.749,78.251) 68.749,80 90.446,80 ccw(c90.446,81.554) 92,81.554 S10.5
RF12: S12.5 U1.36@52.15,49.721 | length 73.7
  Top Layer 1 w0.156: U1.36@52.15,49.721 52.15,52.15 cw(c53,52.15) 53,53 62.46,53 ccw(c62.46,55.54) 65,55.54 65,70.3 65,70.378 ccw(c64.795,70.378) 64.795,70.584 64.697,70.584 cw(c64.697,70.789) 64.697,70.994 65.303,70.994 ccw(c65.303,71.199) 65.303,71.405 64.697,71.405 cw(c64.697,71.61) 64.697,71.815 65.303,71.815 ccw(c65.303,72.02) 65.303,72.226 64.697,72.226 cw(c64.697,72.431) 64.697,72.636 65.303,72.636 ccw(c65.303,72.841) 65.303,73.047 64.697,73.047 cw(c64.697,73.252) 64.697,73.457 65.303,73.457 ccw(c65.303,73.662) 65.303,73.868 64.697,73.868 cw(c64.697,74.073) 64.697,74.278 65.303,74.278 ccw(c65.303,74.483) 65.303,74.689 64.697,74.689 cw(c64.697,74.894) 64.697,75.099 65.303,75.099 ccw(c65.303,75.304) 65.303,75.51 64.697,75.51 cw(c64.697,75.715) 64.697,75.92 65.303,75.92 ccw(c65.303,76.125) 65.303,76.331 64.697,76.331 cw(c64.697,76.536) 64.697,76.741 65.303,76.741 ccw(c65.303,76.946) 65.303,77.152 64.697,77.152 cw(c64.697,77.357) 64.697,77.562 65.303,77.562 ccw(c65.303,77.767) 65.303,77.973 65.205,77.973 cw(c65.205,78.178) 65,78.178 65,78.6 65,83.829 cw(c67.171,83.829) 67.171,86 S12.5
RF13: S13.5 U1.7@47.75,47.921 | length 73.8
  Top Layer 1 w0.156: S13.5 3.618,41 cw(c3.618,42.618) 2,42.618 2,46.015 cw(c3.95,46.015) 3.95,47.965 27,47.965 27.078,47.965 ccw(c27.078,48.171) 27.284,48.171 27.284,48.268 cw(c27.489,48.268) 27.694,48.268 27.694,47.663 ccw(c27.899,47.663) 28.105,47.663 28.105,48.268 cw(c28.31,48.268) 28.515,48.268 28.515,47.663 ccw(c28.72,47.663) 28.926,47.663 28.926,48.268 cw(c29.131,48.268) 29.336,48.268 29.336,47.663 ccw(c29.541,47.663) 29.747,47.663 29.747,48.268 cw(c29.952,48.268) 30.157,48.268 30.157,47.663 ccw(c30.362,47.663) 30.568,47.663 30.568,48.268 cw(c30.773,48.268) 30.978,48.268 30.978,47.663 ccw(c31.183,47.663) 31.389,47.663 31.389,48.268 cw(c31.594,48.268) 31.799,48.268 31.799,47.663 ccw(c32.004,47.663) 32.21,47.663 32.21,48.268 cw(c32.415,48.268) 32.62,48.268 32.62,47.663 ccw(c32.825,47.663) 33.031,47.663 33.031,48.268 cw(c33.236,48.268) 33.441,48.268 33.441,47.663 ccw(c33.646,47.663) 33.852,47.663 33.852,48.268 cw(c34.057,48.268) 34.262,48.268 34.262,47.663 ccw(c34.467,47.663) 34.673,47.663 34.673,48.268 cw(c34.878,48.268) 35.083,48.268 35.083,47.663 ccw(c35.288,47.663) 35.494,47.663 35.494,47.76 cw(c35.699,47.76) 35.699,47.965 36.255,47.965 47.49,47.965 47.505,47.95 47.721,47.95 U1.7@47.75,47.921
RF14: S15.5 U1.8@47.75,47.621 | length 73.6
  Top Layer 1 w0.156: S15.5 23,35.732 cw(c21.268,35.732) 21.268,34 16.975,34 cw(c16.975,35.975) 15,35.975 15,44.984 cw(c17.016,44.984) 17.016,47 17.6,47 17.678,47 ccw(c17.678,47.205) 17.884,47.205 17.884,47.303 cw(c18.089,47.303) 18.294,47.303 18.294,46.697 ccw(c18.499,46.697) 18.705,46.697 18.705,47.303 cw(c18.91,47.303) 19.115,47.303 19.115,46.697 ccw(c19.32,46.697) 19.526,46.697 19.526,47.303 cw(c19.731,47.303) 19.936,47.303 19.936,46.697 ccw(c20.141,46.697) 20.347,46.697 20.347,47.303 cw(c20.552,47.303) 20.757,47.303 20.757,46.697 ccw(c20.962,46.697) 21.168,46.697 21.168,47.303 cw(c21.373,47.303) 21.578,47.303 21.578,46.697 ccw(c21.783,46.697) 21.989,46.697 21.989,47.303 cw(c22.194,47.303) 22.399,47.303 22.399,46.697 ccw(c22.604,46.697) 22.81,46.697 22.81,47.303 cw(c23.015,47.303) 23.22,47.303 23.22,46.697 ccw(c23.425,46.697) 23.631,46.697 23.631,47.303 cw(c23.836,47.303) 24.041,47.303 24.041,46.697 ccw(c24.246,46.697) 24.452,46.697 24.452,47.303 cw(c24.657,47.303) 24.862,47.303 24.862,46.697 ccw(c25.067,46.697) 25.273,46.697 25.273,46.795 cw(c25.478,46.795) 25.478,47 26,47 45.386,47 ccw(c45.386,47.246) 45.632,47.246 cw(c46.007,47.246) 46.007,47.621 U1.8@47.75,47.621
RF15_N: S19.5 U1.10@47.75,47.021 | length 58.4
  Top Layer 1 w0.1: S19.5 16,26 cw(c16,27) 15,27 15,29.944 cw(c16.753,29.944) 16.753,31.697 29,31.697 ccw(c29,33.697) 31,33.697 31,44 cw(c32.697,44) 32.697,45.697 45.348,45.697 ccw(c45.348,46.537) 46.189,46.537 cw(c46.565,46.537) 46.565,46.913 47.17,46.913 ccw(c47.17,48.531) U1.10@47.75,47.021
RF15_P: S17.5 U1.9@47.75,47.321 | length 57.6
  Top Layer 1 w0.1: S17.5 13.697,26 ccw(c13.697,27) 14.697,27 14.697,29.944 cw(c16.753,29.944) 16.753,32 29,32 ccw(c29,33.697) 30.697,33.697 30.697,44 cw(c32.697,44) 32.697,46 45.348,46 ccw(c45.348,46.537) 45.886,46.537 cw(c46.602,46.537) 46.602,47.253 47.168,47.253 ccw(c47.168,49.793) 47.74,47.318 U1.9@47.75,47.321
RF17: S21.5 U1.11@47.75,46.721 | length 73.8
  Top Layer 1 w0.156: S21.5 8,14.46 cw(c10.54,14.46) 10.54,17 30.46,17 ccw(c30.46,19.54) 33,19.54 33,32.8 33,32.878 ccw(c32.795,32.878) 32.795,33.084 32.697,33.084 cw(c32.697,33.289) 32.697,33.494 33.303,33.494 ccw(c33.303,33.699) 33.303,33.905 32.697,33.905 cw(c32.697,34.11) 32.697,34.315 32.795,34.315 ccw(c32.795,34.52) 33,34.52 33,35.2 33,42.46 cw(c35.54,42.46) 35.54,45 46,45 ccw(c46,46) 47,46 cw(c47.721,46) 47.721,46.721 U1.11@47.75,46.721
RF18: S23.5 U1.12@47.75,46.421 | length 73
  Top Layer 1 w0.156: S23.5 32.46,11 ccw(c32.46,13.54) 35,13.54 35,16.685 35,16.764 ccw(c34.795,16.764) 34.795,16.969 34.697,16.969 cw(c34.697,17.174) 34.697,17.379 35.303,17.379 ccw(c35.303,17.585) 35.303,17.79 34.697,17.79 cw(c34.697,17.995) 34.697,18.2 35.303,18.2 ccw(c35.303,18.406) 35.303,18.611 34.697,18.611 cw(c34.697,18.816) 34.697,19.021 35.303,19.021 ccw(c35.303,19.227) 35.303,19.432 34.697,19.432 cw(c34.697,19.637) 34.697,19.842 35.303,19.842 ccw(c35.303,20.048) 35.303,20.253 34.697,20.253 cw(c34.697,20.458) 34.697,20.663 35.303,20.663 ccw(c35.303,20.869) 35.303,21.074 34.697,21.074 cw(c34.697,21.279) 34.697,21.484 35.303,21.484 ccw(c35.303,21.69) 35.303,21.895 34.697,21.895 cw(c34.697,22.1) 34.697,22.305 35.303,22.305 ccw(c35.303,22.511) 35.303,22.716 34.697,22.716 cw(c34.697,22.921) 34.697,23.126 35.303,23.126 ccw(c35.303,23.332) 35.303,23.537 34.697,23.537 cw(c34.697,23.742) 34.697,23.947 35.303,23.947 ccw(c35.303,24.153) 35.303,24.358 34.697,24.358 cw(c34.697,24.563) 34.697,24.768 34.795,24.768 ccw(c34.795,24.974) 35,24.974 35,25.6 35,41.46 cw(c37.54,41.46) 37.54,44 46,44 ccw(c46,45.75) 47.75,45.75 U1.12@47.75,46.421
RF19: S14.5 U1.25@52.15,46.421 | length 73.1
  Top Layer 1 w0.156: U1.25@52.15,46.421 52.15,45.85 ccw(c54,45.85) 54,44 62.46,44 cw(c62.46,41.46) 65,41.46 65,24.9 65,24.327 cw(c64.795,24.327) 64.795,24.122 64.697,24.122 ccw(c64.697,23.917) 64.697,23.712 65.303,23.712 cw(c65.303,23.506) 65.303,23.301 64.697,23.301 ccw(c64.697,23.096) 64.697,22.891 65.303,22.891 cw(c65.303,22.685) 65.303,22.48 64.697,22.48 ccw(c64.697,22.275) 64.697,22.07 65.303,22.07 cw(c65.303,21.864) 65.303,21.659 64.697,21.659 ccw(c64.697,21.454) 64.697,21.249 65.303,21.249 cw(c65.303,21.043) 65.303,20.838 64.697,20.838 ccw(c64.697,20.633) 64.697,20.428 65.303,20.428 cw(c65.303,20.222) 65.303,20.017 64.697,20.017 ccw(c64.697,19.812) 64.697,19.607 65.303,19.607 cw(c65.303,19.401) 65.303,19.196 64.697,19.196 ccw(c64.697,18.991) 64.697,18.786 65.303,18.786 cw(c65.303,18.58) 65.303,18.375 64.697,18.375 ccw(c64.697,18.17) 64.697,17.965 65.303,17.965 cw(c65.303,17.759) 65.303,17.554 64.697,17.554 ccw(c64.697,17.349) 64.697,17.144 65.303,17.144 cw(c65.303,16.938) 65.303,16.733 64.697,16.733 ccw(c64.697,16.528) 64.697,16.323 64.795,16.323 cw(c64.795,16.117) 65,16.117 65,16.039 65,13.54 ccw(c67.54,13.54) 67.54,11 S14.5
RF20: S16.5 U1.26@52.15,46.721 | length 73.3
  Top Layer 1 w0.156: U1.26@52.15,46.721 52.279,46.721 cw(c52.279,46) 53,46 ccw(c54,46) 54,45 64.46,45 cw(c64.46,42.46) 67,42.46 67,34.7 67,34.622 ccw(c67.205,34.622) 67.205,34.416 67.303,34.416 cw(c67.303,34.211) 67.303,34.006 66.697,34.006 ccw(c66.697,33.801) 66.697,33.595 66.795,33.595 cw(c66.795,33.39) 67,33.39 67,32.7 67,19.54 ccw(c69.54,19.54) 69.54,17 90,17 cw(c90,15) 92,15 S16.5
RF21_N: S20.5 U1.28@52.15,47.321 | length 57.8
  Top Layer 1 w0.1: U1.28@52.15,47.321 ccw(c52.742,49.889) 52.742,47.253 53.242,47.253 cw(c53.242,46.3) 54.196,46.3 ccw(c54.496,46.3) 54.496,46 67.303,46 cw(c67.303,44) 69.303,44 69.303,33.697 ccw(c71,33.697) 71,32 82.534,32 cw(c82.534,30.231) 84.303,30.231 84.303,27.036 ccw(c85.34,27.036) 85.34,26 S20.5
RF21_P: S18.5 U1.27@52.15,47.021 | length 56.6
  Top Layer 1 w0.1: U1.27@52.15,47.021 ccw(c52.73,48.534) 52.73,46.913 53.279,46.913 cw(c53.279,46.3) 53.893,46.3 ccw(c54.496,46.3) 54.496,45.697 67.303,45.697 cw(c67.303,44) 69,44 69,33.697 ccw(c71,33.697) 71,31.697 82.534,31.697 cw(c82.534,30.231) 84,30.231 84,27 cw(c83,27) 83,26 S18.5
RF23: S22.5 U1.29@52.15,47.621 | length 73.2
  Top Layer 1 w0.156: U1.29@52.15,47.621 55.007,47.621 cw(c55.007,47.261) 55.367,47.261 ccw(c55.628,47.261) 55.628,47 71.3,47 71.378,47 ccw(c71.378,47.205) 71.584,47.205 71.584,47.303 cw(c71.789,47.303) 71.994,47.303 71.994,46.697 ccw(c72.199,46.697) 72.405,46.697 72.405,47.303 cw(c72.61,47.303) 72.815,47.303 72.815,46.697 ccw(c73.02,46.697) 73.226,46.697 73.226,47.303 cw(c73.431,47.303) 73.636,47.303 73.636,46.697 ccw(c73.841,46.697) 74.047,46.697 74.047,47.303 cw(c74.252,47.303) 74.457,47.303 74.457,46.697 ccw(c74.662,46.697) 74.868,46.697 74.868,47.303 cw(c75.073,47.303) 75.278,47.303 75.278,46.697 ccw(c75.483,46.697) 75.689,46.697 75.689,47.303 cw(c75.894,47.303) 76.099,47.303 76.099,46.697 ccw(c76.304,46.697) 76.51,46.697 76.51,47.303 cw(c76.715,47.303) 76.92,47.303 76.92,46.697 ccw(c77.125,46.697) 77.331,46.697 77.331,47.303 cw(c77.536,47.303) 77.741,47.303 77.741,46.697 ccw(c77.946,46.697) 78.152,46.697 78.152,47.303 cw(c78.357,47.303) 78.562,47.303 78.562,46.697 ccw(c78.767,46.697) 78.973,46.697 78.973,47.303 cw(c79.178,47.303) 79.383,47.303 79.383,46.697 ccw(c79.588,46.697) 79.794,46.697 79.794,47.303 cw(c79.999,47.303) 80.204,47.303 80.204,46.697 ccw(c80.409,46.697) 80.615,46.697 80.615,46.795 cw(c80.82,46.795) 80.82,47 81.4,47 82.083,47 cw(c82.083,45.083) 84,45.083 84,36.602 cw(c82.398,36.602) 82.398,35 78.838,35 cw(c78.838,36.838) 77,36.838 S22.5
RF24: S24.5 U1.30@52.15,47.921 | length 73.4
  Top Layer 1 w0.156: U1.30@52.15,47.921 52.18,47.951 52.396,47.951 52.414,47.969 61.7,47.969 61.778,47.969 ccw(c61.778,48.174) 61.984,48.174 61.984,48.272 cw(c62.189,48.272) 62.394,48.272 62.394,47.666 ccw(c62.599,47.666) 62.805,47.666 62.805,48.272 cw(c63.01,48.272) 63.215,48.272 63.215,47.666 ccw(c63.42,47.666) 63.626,47.666 63.626,48.272 cw(c63.831,48.272) 64.036,48.272 64.036,47.666 ccw(c64.241,47.666) 64.447,47.666 64.447,48.272 cw(c64.652,48.272) 64.857,48.272 64.857,47.666 ccw(c65.062,47.666) 65.268,47.666 65.268,48.272 cw(c65.473,48.272) 65.678,48.272 65.678,47.666 ccw(c65.883,47.666) 66.089,47.666 66.089,48.272 cw(c66.294,48.272) 66.499,48.272 66.499,47.666 ccw(c66.704,47.666) 66.91,47.666 66.91,48.272 cw(c67.115,48.272) 67.32,48.272 67.32,47.666 ccw(c67.525,47.666) 67.731,47.666 67.731,48.272 cw(c67.936,48.272) 68.141,48.272 68.141,47.666 ccw(c68.346,47.666) 68.552,47.666 68.552,48.272 cw(c68.757,48.272) 68.962,48.272 68.962,47.666 ccw(c69.167,47.666) 69.373,47.666 69.373,48.272 cw(c69.578,48.272) 69.783,48.272 69.783,48.174 ccw(c69.988,48.174) 69.988,47.969 70.4,47.969 96.377,47.969 cw(c96.377,46.346) 98,46.346 98,42.329 cw(c96.671,42.329) 96.671,41 S24.5
pads on no net: U1.1@49.05,48.721 U1.2@49.05,48.621 U1.3@49.05,48.521 U1.4@49.05,48.421 U1.5@49.05,48.171 U1.6@49.05,48.071 U1.7@49.05,47.971 U1.8@49.05,47.871 U1.9@49.05,47.621 U1.10@49.05,47.521 U1.11@49.05,47.421 U1.12@49.05,47.321 U1.13@49.25,47.121 U1.14@49.35,47.121 U1.15@49.45,47.121 U1.16@49.55,47.121 U1.17@49.8,47.121 U1.18@49.9,47.121 U1.19@50,47.121 U1.20@50.1,47.121 U1.21@50.35,47.121 U1.22@50.45,47.121 U1.23@50.55,47.121 U1.24@50.65,47.121 U1.25@50.85,47.321 U1.26@50.85,47.421 U1.27@50.85,47.521 U1.28@50.85,47.621 U1.29@50.85,47.871 U1.30@50.85,47.971 U1.31@50.85,48.071 U1.32@50.85,48.171 U1.33@50.85,48.421 U1.34@50.85,48.521 U1.35@50.85,48.621 U1.36@50.85,48.721 U1.37@50.65,48.921 U1.38@50.55,48.921 U1.39@50.45,48.921 U1.40@50.35,48.921 U1.41@50.1,48.921 U1.42@50,48.921 U1.43@49.9,48.921 U1.44@49.8,48.921 U1.45@49.55,48.921 U1.46@49.45,48.921 U1.47@49.35,48.921 U1.48@49.25,48.921

## Silkscreen, mask and mechanical layers (free items; w line width, h text height)
Mechanical 1:
  the board outline again, w0.254